# EAGLE board Projeto Display 7 Segmentos MUX - EF (EAGLE 7.6.0)

Size 73.58 x 330.09 mm. Coordinates in mm from the lower left corner, seen from the top.
Outline: 0,0 56.82,0 56.82,53.33 0,53.33 0,0
Copper layers (1*16): Top 0.035mm / dielectric 1.5mm / Bottom 0.035mm
Design rules "default": minimum track width 10mil, minimum drill 24mil, track to track 8mil, track to pad 8mil, pad to pad 8mil, via to via 8mil, smd to smd 8mil, copper to edge 40mil, drill to drill 8mil, minimum pad ring 10mil, minimum via ring 8mil, stop-mask expansion 4mil, vias tented up to drill 0mil, thermal gap 10mil

## Footprints (pad centres in the part's own frame; a part is rotated, then mirrored left to right if it is on the bottom)
C5B2.5 = drill 0.813 pad 1.6 octagon: 1 -2.54,0; 2 2.54,0
HDSP-M = drill 0.813 long: 1 -5.08,-7.62; 2 -2.54,-7.62; 3 0,-7.62; 4 2.54,-7.62; 5 5.08,-7.62; 6 5.08,7.62; 7 2.54,7.62; 8 0,7.62; 9 -2.54,7.62; 10 -5.08,7.62
2P-2.54-65/35MIL = drill 0.889 pad 1.651 square: 1 0,1.27 | drill 0.889 pad 1.651: 2 0,-1.27
0207/10 = drill 0.813 octagon: 1 -5.08,0; 2 5.08,0
TO92 = drill 0.813 octagon: 1 1.27,0; 2 0,1.905; 3 -1.27,0
ARDUINO_UNO = drill 1.016 pad 1.88: 0 63.5,50.8; 1 60.96,50.8; 2 58.42,50.8; 3 55.88,50.8; 3.3V 35.56,2.54; 4 53.34,50.8; 5 50.8,50.8; 5V 38.1,2.54; 6 48.26,50.8; 7 45.72,50.8; 8 41.656,50.8; 9 39.116,50.8; 10 36.576,50.8; 11 34.036,50.8; 12 31.496,50.8; 13 28.956,50.8; A0 50.8,2.54; A1 53.34,2.54; A2 55.88,2.54; A3 58.42,2.54; A4 60.96,2.54; A5 63.5,2.54; AREF 23.876,50.8; GND 26.416,50.8; GND. 43.18,2.54; GND.. 40.64,2.54; I/OREF 30.48,2.54; N/C 27.94,2.54; RESET 33.02,2.54; SCL 18.796,50.8; SDA 21.336,50.8; VIN 45.72,2.54 | hole 3.2: 66.04,7.62; 66.04,35.56; 15.24,50.8; 13.97,2.54
DIL16 = drill 0.813 long: 1 -8.89,-3.81; 2 -6.35,-3.81; 3 -3.81,-3.81; 4 -1.27,-3.81; 5 1.27,-3.81; 6 3.81,-3.81; 7 6.35,-3.81; 8 8.89,-3.81; 9 8.89,3.81; 10 6.35,3.81; 11 3.81,3.81; 12 1.27,3.81; 13 -1.27,3.81; 14 -3.81,3.81; 15 -6.35,3.81; 16 -8.89,3.81
DIL14 = drill 0.813 long: 1 -7.62,-3.81; 2 -5.08,-3.81; 3 -2.54,-3.81; 4 0,-3.81; 5 2.54,-3.81; 6 5.08,-3.81; 7 7.62,-3.81; 8 7.62,3.81; 9 5.08,3.81; 10 2.54,3.81; 11 0,3.81; 12 -2.54,3.81; 13 -5.08,3.81; 14 -7.62,3.81

## Placement (x,y rotation side)
C1  100uF  [C5B2.5]  5,149.78 0 top
C2  100uF  [C5B2.5]  5,162.48 0 top
C3  100uF  [C5B2.5]  5,175.18 0 top
C4  100uF  [C5B2.5]  5,429.18 0 top  (outside the outline)
Digit1  [HDSP-M]  5,35.48 0 top
Digit2  [HDSP-M]  5,48.18 0 top
Digit3  [HDSP-M]  5,60.88 0 top
Digit4  [HDSP-M]  5,73.58 0 top
Digit5  [HDSP-M]  5,86.28 0 top
Digit6  [HDSP-M]  5,98.98 0 top
Digit7  [HDSP-M]  5,111.68 0 top
Digit8  [HDSP-M]  5,124.38 0 top
P1  5V  [2P-2.54-65/35MIL]  5,137.08 0 top
R1  10k‎Ω  [0207/10]  5,22.78 0 top
R2  1k‎Ω  [0207/10]  5,213.28 0 top
R3  1k‎Ω  [0207/10]  5,225.98 0 top
R4  1k‎Ω  [0207/10]  5,238.68 0 top
R5  10k‎Ω  [0207/10]  5,251.38 0 top
R6  10k‎Ω  [0207/10]  5,264.08 0 top
R7  150‎Ω  [0207/10]  5,340.28 0 top  (outside the outline)
R8  150‎Ω  [0207/10]  5,352.98 0 top  (outside the outline)
R9  150‎Ω  [0207/10]  5,365.68 0 top  (outside the outline)
R10  150‎Ω  [0207/10]  5,378.38 0 top  (outside the outline)
R11  150‎Ω  [0207/10]  5,391.08 0 top  (outside the outline)
R12  150‎Ω  [0207/10]  5,403.78 0 top  (outside the outline)
R13  150‎Ω  [0207/10]  5,416.48 0 top  (outside the outline)
T1  [TO92]  5,10.08 0 top
T2  [TO92]  5,187.88 0 top
T3  [TO92]  5,200.58 0 top
U1  [ARDUINO_UNO]  5,276.78 0 top
U5  [DIL16]  5,289.48 0 top
U8  [DIL14]  5,302.18 0 top
U9  [DIL14]  5,314.88 0 top
U10  [DIL14]  5,327.58 0 top

## Library data of the parts
C1-C4 Digit1-Digit8 P1 R1-R13 T1-T3 U1 U5 U8-U10 = AUTODESK_CIRCUITS_BREADBOARD

## Nets
N$1: Digit1.2 Digit2.2 Digit3.2 Digit4.2 Digit5.2 Digit6.2 Digit7.2 Digit8.2 R10.2
N$2: Digit5.5
N$3: Digit7.5
N$4: Digit8.5
N$5: Digit4.5
N$6: Digit3.5
N$7: Digit2.5
N$8: Digit1.5
N$9: Digit2.3 Digit2.8 U8.6
N$10: Digit3.3 Digit3.8 U8.8
N$11: R4.1 U1.4 U8.5 U9.11 U9.13 U10.3
N$12: Digit8.3 Digit8.8 U9.6
N$13: Digit4.3 Digit4.8 U9.12
N$14: Digit7.3 Digit7.8 U9.8
N$15: R5.1 T2.3 U8.2 U8.4 U9.4 U9.10
N$16: Digit6.3 Digit6.8 U10.12
N$17: R2.2 T1.2
N$18: R3.2 T2.2
N$19: R4.2 T3.2
N$20: R1.1 T1.3 U8.1 U8.3 U8.9 U9.1
N$21: R6.1 T3.3 U8.11 U8.13 U9.5 U10.13
N$22: R3.1 U1.3 U8.10 U9.2 U10.2 U10.4
N$23: R2.1 U1.2 U9.3 U9.9 U10.1 U10.5
N$24: Digit5.3 Digit5.8 U10.6
N$25: U1.5 U5.7
N$26: U1.8 U5.6
N$27: R7.1 U5.9
N$28: R11.1 U5.11
N$29: R9.1 U5.12
N$30: R8.1 U5.13
N$31: R13.1 U5.14
N$32: U1.6 U5.1
N$33: U1.7 U5.2
N$34: C1.2 C2.2 C3.2 C4.2 P1.2 R1.2 R5.2 R6.2 U5.3 U5.4 U5.16 U8.14 U9.14 U10.14
N$35: U10.8
N$36: Digit6.5
N$37: R10.1 U5.10
N$38: Digit1.4 Digit2.4 Digit3.4 Digit4.4 Digit5.4 Digit6.4 Digit7.4 Digit8.4 R11.2
N$39: Digit1.7 Digit2.7 Digit3.7 Digit4.7 Digit5.7 Digit6.7 Digit7.7 Digit8.7 R8.2
N$40: Digit1.10 Digit2.10 Digit3.10 Digit4.10 Digit5.10 Digit6.10 Digit7.10 Digit8.10 R13.2
N$41: R12.1 U5.15
N$42: Digit1.9 Digit2.9 Digit3.9 Digit4.9 Digit5.9 Digit6.9 Digit7.9 Digit8.9 R12.2
N$43: Digit1.6 Digit2.6 Digit3.6 Digit4.6 Digit5.6 Digit6.6 Digit7.6 Digit8.6 R9.2
N$44: Digit1.3 Digit1.8 U8.12
N$45: Digit1.1 Digit2.1 Digit3.1 Digit4.1 Digit5.1 Digit6.1 Digit7.1 Digit8.1 R7.2
N$46: C1.1 C2.1 C3.1 C4.1 P1.1 T1.1 T2.1 T3.1 U1.GND.. U5.5 U5.8 U8.7 U9.7 U10.7 U10.9 U10.10 U10.11

## Tracks (layer width: path | path; a pad name or v marks a point on that pad's centre or on a via)
N$1  (8 unrouted)
N$9  (2 unrouted)
N$10  (2 unrouted)
N$11  (5 unrouted)
N$12  (2 unrouted)
N$13  (2 unrouted)
N$14  (2 unrouted)
N$15  (5 unrouted)
N$16  (2 unrouted)
N$17  (1 unrouted)
N$18  (1 unrouted)
N$19  (1 unrouted)
N$20  (5 unrouted)
N$21  (5 unrouted)
N$22  (5 unrouted)
N$23  (5 unrouted)
N$24  (2 unrouted)
N$25  (1 unrouted)
N$26  (1 unrouted)
N$27  (1 unrouted)
N$28  (1 unrouted)
N$29  (1 unrouted)
N$30  (1 unrouted)
N$31  (1 unrouted)
N$32  (1 unrouted)
N$33  (1 unrouted)
N$34  (13 unrouted)
N$37  (1 unrouted)
N$38  (8 unrouted)
N$39  (8 unrouted)
N$40  (8 unrouted)
N$41  (1 unrouted)
N$42  (8 unrouted)
N$43  (8 unrouted)
N$44  (2 unrouted)
N$45  (8 unrouted)
N$46  (16 unrouted)